# EAGLE board module (EAGLE 7.7.0)
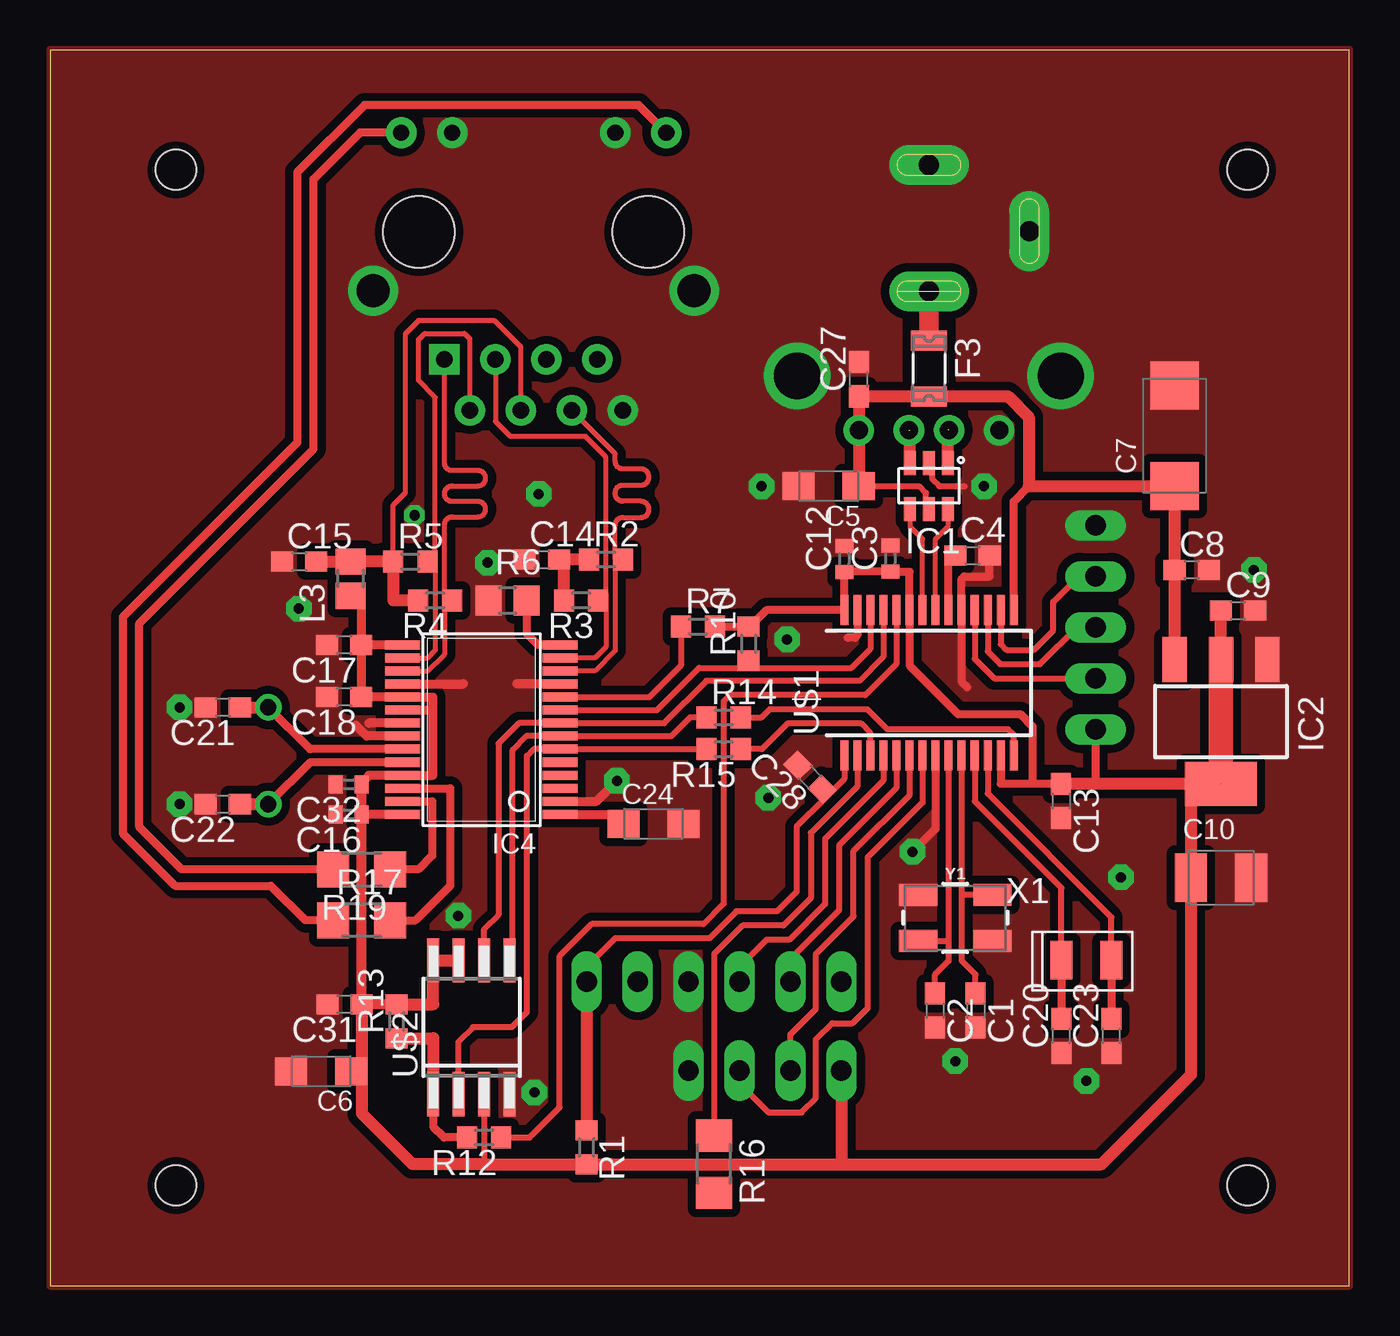
[diagram p0: board, top side]
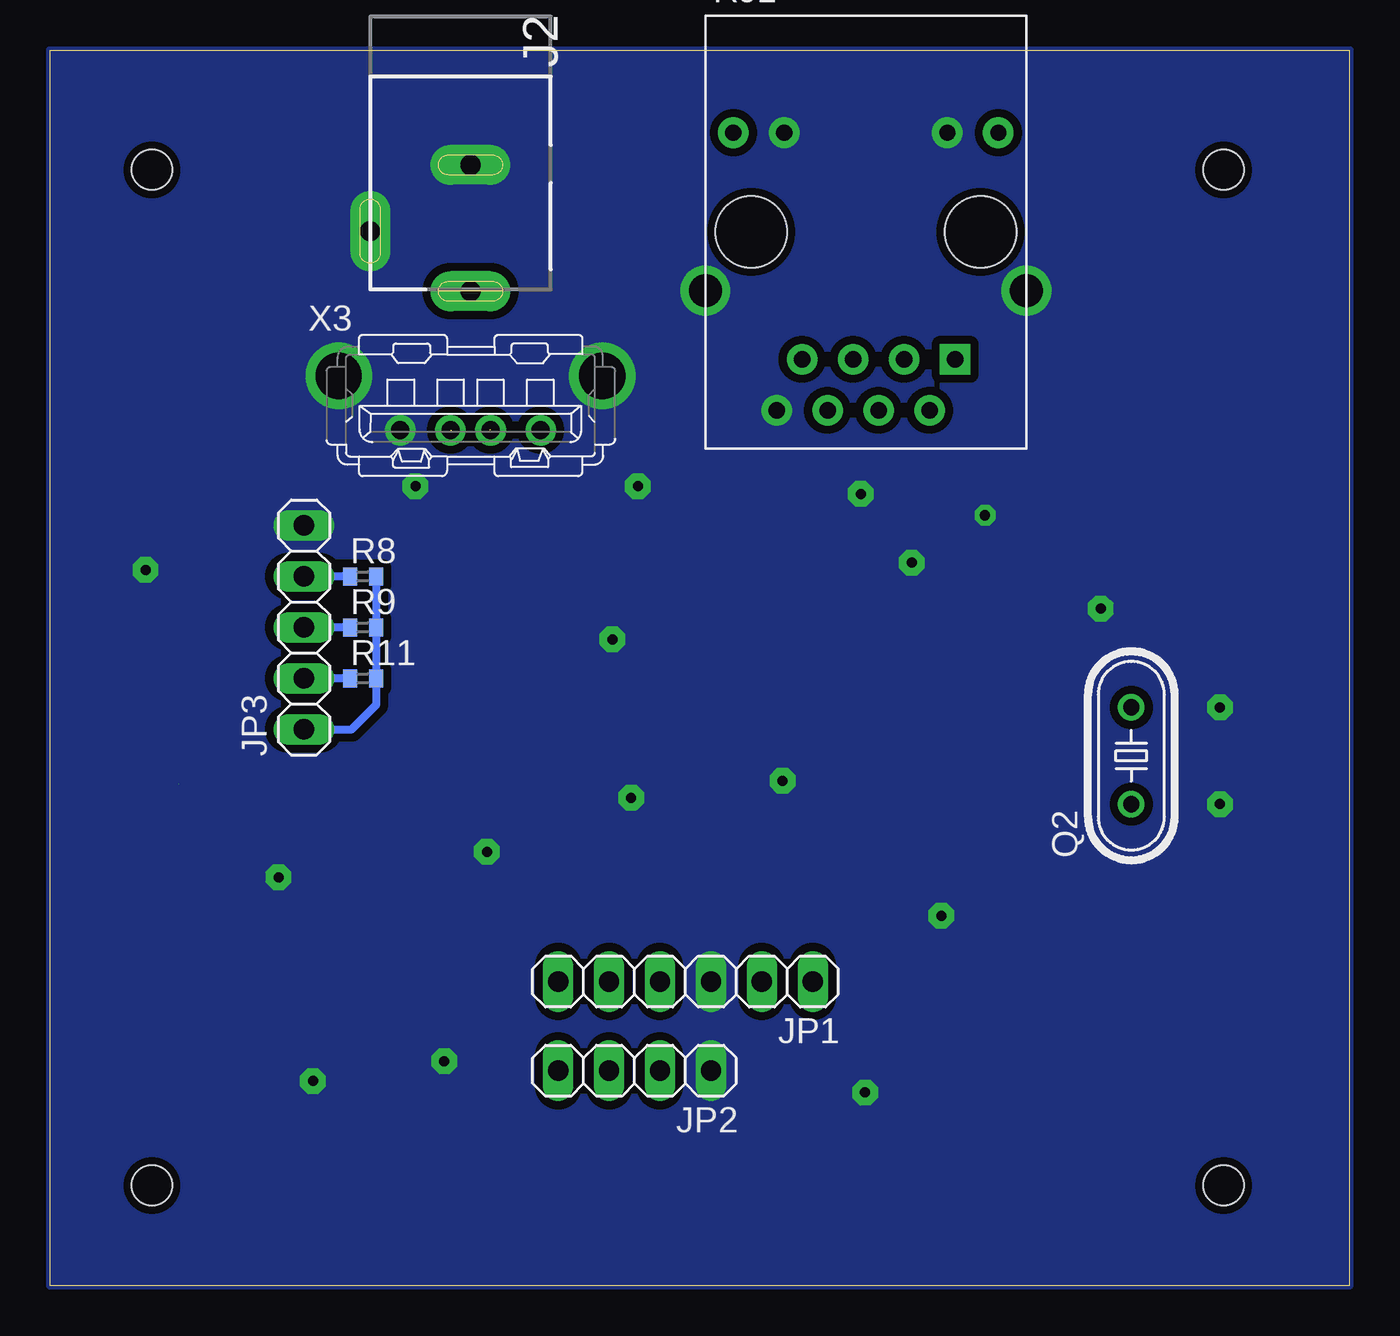
[diagram p1: board, bottom side, seen from below]

Size 64.77 x 61.59 mm. Coordinates in mm from the lower left corner, seen from the top.
Outline: 0,0 64.77,0 64.77,61.59 0,61.59 0,0
Copper layers (1*16): Top 0.035mm / dielectric 1.5mm / Bottom 0.035mm
Design rules "default *": minimum track width 10mil, minimum drill 24mil, track to track 8mil, track to pad 8mil, pad to pad 8mil, via to via 8mil, smd to smd 8mil, copper to edge 0mil, drill to drill 8mil, minimum pad ring 10mil, minimum via ring 8mil, stop-mask expansion 4mil, vias tented up to drill 0mil, thermal gap 10mil
Holes 2 mm at 6.27,55.63 6.27,5 59.7,5 59.7,55.63
tRestrict: area 16.6,23.3 to 18.4,32.2; area 24.5,23.3 to 26.3,32.2; area 39.4,32.9 to 48.2,34.4; area 39.4,25.7 to 48.2,27.2; area 43.5,40.6 to 44.1,41.6

## Footprints (pad centres in the part's own frame; a part is rotated, then mirrored left to right if it is on the bottom)
C0603 = smd 1.1 x 1: 1 -0.85,0; 2 0.85,0
C0402 = smd 0.7 x 0.9: 1 -0.65,0; 2 0.65,0
SMC_A = smd 1.6 x 1.4: + -1.5,0; - 1.5,0
SMC_C = smd 2.4 x 2.4: + -2.5,0; - 2.5,0
SMC_B = smd 1.6 x 2.4: + -1.5,0; - 1.5,0
1206L = smd 1 x 1.8: 1 -1.4,0; 2 1.4,0
SOT-23-6L = smd 0.6 x 1.2: 1 -0.95,-2.3; 2 0,-2.3; 3 0.95,-2.3; 4 0.95,0; 5 0,0; 6 -0.95,0
SOT223 = smd 1.219 x 2.235: 1 -2.311,-3.099; 2 0,-3.099; 3 2.311,-3.099 | smd 3.6 x 2.2: TAB 0,3.099
TSSOP28W = smd 0.45 x 1.75: P$1 0,-0.65; P$2 0.65,-0.65; P$3 1.3,-0.65; P$4 1.95,-0.65; P$5 2.6,-0.65; P$6 3.25,-0.65; P$7 3.9,-0.65; P$8 4.55,-0.65; P$9 5.2,-0.65; P$10 5.85,-0.65; P$11 6.5,-0.65; P$12 7.15,-0.65; P$13 7.8,-0.65; P$14 8.45,-0.65; P$15 8.45,7.2; P$16 7.8,7.2; P$17 7.15,7.2; P$18 6.5,7.2; P$19 5.85,7.2; P$20 5.2,7.2; P$21 4.55,7.2; P$22 3.9,7.2; P$23 3.25,7.2; P$24 2.6,7.2; P$25 1.95,7.2; P$26 1.3,7.2; P$27 0.65,7.2; P$28 0,7.2
POWER_JACK_SLOT = drill 1 pad 2 long: GND@1 2.58,7.5; GND@2 7.58,10.8; PWR 2.58,13.8
1X06 = drill 1.016 long: 1 -6.35,0; 2 -3.81,0; 3 -1.27,0; 4 1.27,0; 5 3.81,0; 6 6.35,0
1X04 = drill 1.016 long: 1 -3.81,0; 2 -1.27,0; 3 1.27,0; 4 3.81,0
1X05 = drill 1.016 long: 1 -5.08,0; 2 -2.54,0; 3 0,0; 4 2.54,0; 5 5.08,0
FB805 = smd 1.3 x 1.5: 1 -0.85,0; 2 0.85,0
HC49/S = drill 0.813: 1 -2.413,0; 2 2.413,0
R0603 = smd 1 x 1.1: 1 -0.85,0; 2 0.85,0
R0805 = smd 1.3 x 1.5: 1 -0.95,0; 2 0.95,0
R0402 = smd 0.7 x 0.9: 1 -0.65,0; 2 0.65,0
R1206 = smd 1.6 x 1.803: 1 -1.422,0; 2 1.422,0
HR911105A = drill 0.813 pad 1.524: G+ 4.953,-6.604; G- 4.953,-4.064; GND -8.89,4.445; NC -6.35,3.175; P4 -8.89,-0.635; P5 -6.35,0.635; RD+ -6.35,-1.905; RD- -8.89,1.905; TD- -8.89,-3.175; Y+ 4.953,6.604; Y- 4.953,4.064 | drill 1.651 pad 2.159: SHIELD0 -2.921,8.001; SHIELD1 -2.921,-8.001 | drill 0.813 pad 1.524 square: TD+ -6.35,-4.445 | hole 3.556: 0,-5.715; 0,5.715
SSOP28 = smd 0.4 x 1.5: 1 -4.225,-3.625; 2 -3.575,-3.625; 3 -2.925,-3.625; 4 -2.275,-3.625; 5 -1.625,-3.625; 6 -0.975,-3.625; 7 -0.325,-3.625; 8 0.325,-3.625; 9 0.975,-3.625; 10 1.625,-3.625; 11 2.275,-3.625; 12 2.925,-3.625; 13 3.575,-3.625; 14 4.225,-3.625; 15 4.225,3.625; 16 3.575,3.625; 17 2.925,3.625; 18 2.275,3.625; 19 1.625,3.625; 20 0.975,3.625; 21 0.325,3.625; 22 -0.325,3.625; 23 -0.975,3.625; 24 -1.625,3.625; 25 -2.275,3.625; 26 -2.925,3.625; 27 -3.575,3.625; 28 -4.225,3.625
SO-08M = smd 0.6 x 2.2: 1 -1.905,-3.33; 2 -0.635,-3.33; 3 0.635,-3.33; 4 1.905,-3.33; 5 1.905,3.33; 6 0.635,3.33; 7 -0.635,3.33; 8 -1.905,3.33
3.2X1.5-2-PAD = smd 1.1 x 1.9: 1 -1.25,0; 2 1.25,0
KUSBVX = drill 0.9 pad 1.524: 1 3.5,0; 2 1,0; 3 -1,0; 4 -3.5,0 | drill 2.3 pad 2.8: M1 -6.57,2.71; M2 6.57,2.71
CRYSTAL-SMD-5X3.2-4PAD = smd 1.9 x 1.1: 1 -1.85,-1.15; 2 1.85,-1.15; 3 1.85,1.15; 4 -1.85,1.15

## Placement (x,y rotation side)
C1  [C0603]  46.13,13.72 270 top
C2  [C0603]  44.11,13.72 270 top
C3  [C0402]  41.88,36.25 90 top
C4  [C0603]  45.99,36.4 0 top
C5  [SMC_A]  38.81,39.85 180 top
C6  [SMC_A]  13.51,10.69 180 top
C7  [SMC_C]  56.06,42.37 90 top
C8  [C0603]  56.91,35.69 0 top
C9  [C0603]  59.22,33.66 0 top
C10  [SMC_B]  58.37,20.34 0 top
C12  [C0402]  39.59,36.23 90 top
C13  [C0603]  50.39,24.17 270 top
C14  [C0603]  24.51,36.2 0 top
C15  [C0603]  12.42,36.09 0 top
C16  [C0402]  14.88,23.5 180 top
C17  [C0603]  14.66,31.95 180 top
C18  [C0603]  14.65,29.35 180 top
C20  [C0603]  50.41,12.45 90 top
C21  [C0603]  8.61,28.83 180 top
C22  [C0603]  8.61,24 180 top
C23  [C0603]  52.91,12.45 90 top
C24  [SMC_A]  30.08,23.02 0 top
C27  [C0603]  40.31,45.19 90 top
C28  [C0603]  37.88,25.35 135 top
C31  100nF  [C0603]  14.68,14.03 180 top
C32  [C0402]  14.88,24.99 180 top
F3  1206L012  [1206L]  43.81,45.72 270 top
IC1  IC_USBLC6-2  [SOT-23-6L]  43.81,38.71 180 top
IC2  LM1117IMPX-3.3  [SOT223]  58.37,28.12 180 top
IC4  ENC28J60  [TSSOP28W]  24.77,23.5 90 top
J2  POWER_JACKSLT  [POWER_JACK_SLOT]  41.24,63.37 180 bottom
JP1  [1X06]  33.1,15.16 180 bottom
JP2  [1X04]  35.64,10.72 180 bottom
JP3  [1X05]  52.12,32.82 90 bottom
L3  [FB805]  14.98,35.24 90 top
Q2  [HC49/S]  10.87,26.42 90 bottom
R1  [R0603]  26.75,6.9 270 top
R2  [R0603]  27.71,36.2 0 top
R3  [R0603]  26.47,34.16 180 top
R4  [R0603]  19.19,34.16 180 top
R5  [R0603]  17.96,36.09 0 top
R6  [R0805]  22.81,34.16 0 top
R7  [R0603]  32.3,32.85 0 top
R8  [R0402]  49.17,35.36 0 bottom
R9  [R0402]  49.17,32.82 0 bottom
R10  [R0603]  34.82,32 90 top
R11  [R0402]  49.17,30.28 0 bottom
R12  0R  [R0603]  21.64,7.39 180 top
R13  10k?  [R0603]  17.27,13.18 90 top
R14  [R0603]  33.58,28.33 0 top
R15  [R0603]  33.58,26.75 180 top
R16  [R1206]  33.1,6.06 270 top
R17  [R1206]  15.53,18.21 0 top
R19  [R1206]  15.53,20.75 180 top
RJ1  HR911105A  [HR911105A]  24.1,52.53 90 bottom
U$1  PIC32MX250F128B2  [SSOP28]  43.81,30.05 0 top
U$2  SST25VF016BSO8M  [SO-08M]  21.01,12.88 0 top
X1  CRYSTALS-NOGND-CFPX-217  [3.2X1.5-2-PAD]  51.66,16.23 0 top
X3  KUSBVX  [KUSBVX]  43.81,42.65 0 bottom
Y1  CRYSTAL-GROUNDEDSMD-5X3.2  [CRYSTAL-SMD-5X3.2-4PAD]  45.12,18.34 0 top

## Library data of the parts
C1-C10 C12-C18 C20-C24 C27 C28 C31 C32 R1-R17 R19 = rcl
F3 = polyfuse-smd_10; MF: Littelfuse; MPN: 1206L012; OC_FARNELL: 1596988; OC_NEWARK: 05M2298
IC1 L3 = dp_devices
IC2 = lm1117
IC4 = microchip
J2 = SparkFun-Connectors; PROD_ID: PRT-00119
JP1-JP3 = pinhead
Q2 = crystal; OC_FARNELL: 1667008; OC_NEWARK: unknown
RJ1 = hanrun
U$1 = microchip-pic32mx
U$2 = mw
X1 = IQD-Frequency-Products
X3 = con-kycon
Y1 = SparkFun-Clocks

## Nets
_3V: C3.1 C6.+ C9.1 C10.+ C12.1 C13.1 C16.1 C17.1 C18.1 C31.1 C32.1 IC2.2 IC2.TAB IC4.P$15 IC4.P$19 IC4.P$20 IC4.P$25 IC4.P$28 JP2.4 JP3.1 L3.1 R1.2 R7.2 R8.2 R9.2 R10.2 R11.2 R13.2 U$1.13 U$1.23 U$1.28 U$2.3 U$2.7 U$2.8
CE: R12.1 U$1.24
CE1: R12.2 R13.1 U$2.1
D_N: IC1.4 U$1.22
D_P: IC1.6 U$1.21
ENC_CS: IC4.P$9 R10.1 U$1.26
ENC_RST: IC4.P$10 R7.1
GND: C1.2 C2.2 C3.2 C4.2 C5.- C6.- C7.- C8.2 C9.2 C10.- C12.2 C13.2 C14.1 C15.1 C16.2 C17.2 C18.2 C20.1 C21.2 C22.2 C23.1 C24.- C27.2 C28.2 C31.2 C32.2 IC1.2 IC2.1 IC4.P$2 IC4.P$11 IC4.P$18 IC4.P$21 IC4.P$22 J2.GND@1 J2.GND@2 JP1.3 JP2.1 JP3.5 R6.1 RJ1.G- RJ1.GND RJ1.SHIELD0 RJ1.SHIELD1 RJ1.Y- U$1.8 U$1.19 U$1.27 U$2.4 X3.4 X3.M1 X3.M2 Y1.2 Y1.4
IO_INT: JP3.4 R8.1 U$1.16
LEDA: IC4.P$27 R19.1
LEDB: IC4.P$26 R17.2
MCLR: C28.1 JP1.1 R1.1 U$1.1
MISO: IC4.P$6 R15.2 U$2.2
MOSI: IC4.P$7 R14.1 U$2.5
N$2: C14.2 R2.1 R3.2
N$6: C15.2 L3.2 R4.2 R5.1 RJ1.P4
N$7: C4.1 U$1.20
N$9: IC1.1 X3.3
N$10: IC1.3 X3.2
N$12: IC4.P$14 R6.2
N$13: R14.2 U$1.14
N$14: F3.1 J2.PWR
N$15: R15.1 U$1.3
N$16: R16.1 U$1.2
N$17: C1.1 U$1.10 Y1.3
N$18: C2.1 U$1.9 Y1.1
N$22: C21.1 IC4.P$23 Q2.2
N$23: C22.1 IC4.P$24 Q2.1
N$29: C24.+ IC4.P$1
N$30: R17.1 RJ1.Y+
N$31: R19.2 RJ1.G+
PGEC: JP1.5 U$1.5
PGED: JP1.4 U$1.4
RXD: JP2.3 U$1.6
SCK: IC4.P$8 U$1.25 U$2.6
SCL: JP3.3 R9.1 U$1.17
SDA: JP3.2 R11.1 U$1.18
SOSCI: C20.2 U$1.11 X1.1
SOSCO: C23.2 U$1.12 X1.2
TPIN_N: IC4.P$12 R2.2 RJ1.RD-
TPIN_P: IC4.P$13 R3.1 RJ1.RD+
TPOUT_N: IC4.P$16 R5.2 RJ1.TD-
TPOUT_P: IC4.P$17 R4.1 RJ1.TD+
TXD: JP2.2 U$1.7
VBUS: C5.+ C7.+ C8.1 C27.1 F3.2 IC1.5 IC2.3 U$1.15 X3.1

## Tracks (layer width: path | path; a pad name or v marks a point on that pad's centre or on a via)
_3V  (1 unrouted)
  Top 0.305: U$2.3 21.64,6.06 | R1.2 27.95,6.05 27.94,6.06 | C10.+ 56.87,20.32
  Top 0.406: U$1.13 47.39,25.02 48.97,25.02 | 48.97,25.02 48.97,27.89 48.36,28.5 45.26,28.5 42.84,30.92 U$1.23 42.84,35.6 C3.1 39.6,35.6 C12.1 U$1.28 | 39.59,33.23 U$1.28 | U$1.28 35.7,33.67 34.89,32.85 R10.2 R7.2 | 48.97,25.02 C13.1 | JP3.1 52.12,25.02 | C6.+ 15.43,10.69 15.53,10.79
  Top 0.457: IC4.P$20 19.07,28.7 | 19.07,28.7 19.07,25.45 IC4.P$25 15.89,25.45 15.53,25.09 C32.1 | IC4.P$28 C16.1 | 19.07,28.7 19.07,29.34 IC4.P$19 C18.1 C17.1 | L3.1 15.45,33.92 15.5,33.92 C17.1 | IC4.P$15 C17.1
  Top 0.508: C32.1 C16.1 C31.1 R13.2
  Top 0.61: R13.2 19.1,14.03 U$2.8 U$2.7 | C31.1 15.53,10.79 15.53,8.6 18.07,6.06 21.64,6.06 27.94,6.06 39.45,6.06 | JP2.4 39.45,6.06 | 39.45,6.06 52.41,6.06 56.87,10.52 56.87,20.32 56.87,25.02 | IC2.2 C9.1 | 56.87,25.02 IC2.TAB | 56.87,25.02 52.12,25.02 C13.1
  Top 1.219: IC2.TAB IC2.2
  Bottom 0.406: R8.2 R9.2 R11.2 48.52,28.95 49.73,27.74 JP3.1
CE
  Top 0.305: U$1.24 42.19,30.99 40.64,29.44 33.88,29.44 33.58,29.13 33.58,19.05 32.56,18.03 27,18.03 25.4,16.43 25.4,8.89 23.9,7.39 R12.1
CE1
  Top 0.406: R12.2 19.63,7.39 19.1,7.92 U$2.1
  Top 0.61: R13.1 19.1,12.33 U$2.1
D_N
  Top 0.254: U$1.22 43.49,37.23 42.87,37.86 IC1.4
D_P
  Top 0.254: U$1.21 44.14,37.23 44.77,37.86 IC1.6
ENC_CS
  Top 0.305: U$1.26 40.89,31.75 39.95,30.8 34.92,30.8 | 34.92,30.8 32.35,30.8 30.24,28.7 IC4.P$9 | R10.1 34.82,30.91 34.92,30.8
ENC_RST
  Top 0.305: IC4.P$10 29.88,29.34 31.45,30.91 R7.1 31.45,32.82
GND  (via drill 0.5 pad 1.02, 0.5 pad 1.27)
  Top 0.305: 45.59,39.85 44.32,39.85 43.96,40.21 43.96,40.86 IC1.2
  Top 0.406: U$1.27 40.24,32.42 40.13,32.31 39.75,32.31 | U$1.8 44.14,22.78 v42.99,21.63 | C4.2 46.84,35.36 45.57,35.36 45.44,35.23 U$1.19 45.44,30.12 45.72,29.84
  Top 0.457: IC4.P$11 23.27,30 | IC4.P$18 20.6,30 | IC4.P$21 15.9,28.05 | IC4.P$22 15.79,27.39 15.24,27.94 | IC4.P$2 27.23,24.14 v28.26,25.17
  other vias: 18.16,38.4 6.45,28.83 6.45,24 12.4,33.76 21.82,36.04 24.36,39.47 46.56,39.85 24.14,9.63 36.74,32.22 35.8,24.32 20.35,18.44 45.12,11.19 51.66,10.2 53.39,20.36 35.47,39.85 60.01,35.69
  pour Top (isolate 0.406, rank 2, no thermals): 0,61.59 0,0 64.77,0 64.77,61.59
  pour Bottom (isolate 0.406, no thermals): 0,61.59 0,0 64.77,0 64.77,61.59
IO_INT
  Top 0.305: U$1.16 47.39,31.98 47.68,31.7 49.05,31.7 50.01,32.66 50.01,34.09 51.28,35.36 JP3.4
  Bottom 0.406: R8.1 JP3.4
LEDA
  Top 0.406: IC4.P$27 19.05,24.14 19.05,21.44 18.36,20.75 R19.1
LEDB
  Top 0.406: IC4.P$26 19.94,24.8 19.94,19.94 18.21,18.21 R17.2
MCLR
  Top 0.305: JP1.1 26.75,15.9 28.17,17.32 32.87,17.32 34.21,18.67 36.25,18.67 37.21,19.63 37.21,22.89 38.59,24.27 | U$1.1 39.59,25.26 38.59,24.27 | C28.1 38.48,24.38 38.59,24.27
  Top 0.61: JP1.1 R1.1
MISO
  Top 0.305: U$2.2 20.37,12.17 21.08,12.88 23.01,12.88 23.77,13.64 23.77,26.42 24.11,26.75 IC4.P$6 R15.2
MOSI
  Top 0.305: U$2.5 23.06,15.63 23.06,26.72 23.74,27.39 IC4.P$7 30.97,27.39 31.91,28.33 R14.1
N$1
  cutout Top: 42.51,48.26 42.51,44.45 45.12,44.45 45.12,48.26
N$2
  Top 0.61: R3.2 25.62,36.02 25.54,36.02 C14.2 R2.1
N$3
  cutout Top: 56.52,34.56 57.78,34.56 57.78,33.66 56.52,33.66
N$6
  Top 0.254: RJ1.P4 23.47,46.79 22.12,48.13 18.39,48.13 17.7,47.45 17.7,39.52 17.11,38.93 R5.1
  Top 0.61: R4.2 17.11,34.16 R5.1 L3.2 C15.2
N$7
  Top 0.406: U$1.20 44.79,36.05 C4.1
N$9  (1 unrouted)
  Top 0.602: IC1.1 44.77,42.64
N$10  (1 unrouted)
  Top 0.602: IC1.3 42.87,42.64
N$12
  Top 0.406: IC4.P$14 24.32,31.95 23.76,32.5 R6.2
N$13
  Top 0.305: U$1.14 48.04,27.45 47.75,27.74 41.73,27.74 40.74,28.73 35.87,28.73 35.47,28.33 R14.2
N$14
  Top 0.813: F3.1
  Top 0.965: J2.PWR F3.1
N$15
  Top 0.305: U$1.3 40.89,27.56 40.44,28.02 36.75,28.02 35.48,26.75 R15.1
N$16
  Top 0.305: U$1.2 40.24,24.9 37.92,22.58 37.92,19.33 36.55,17.96 34.52,17.96 33.1,16.54 R16.1
N$17
  Top 0.305: U$1.10 45.44,19.49 | 45.44,19.49 45.44,16.21 46.13,15.51 C1.1 | Y1.3 45.44,19.49
N$18
  Top 0.305: U$1.9 44.79,17.19 | 44.79,17.19 44.79,16.19 44.11,15.51 C2.1 | Y1.1 44.79,17.19
N$22
  Top 0.406: IC4.P$23 12.96,26.75 Q2.2
  Top 0.61: C21.1 Q2.2
N$23
  Top 0.406: IC4.P$24 12.96,26.09 Q2.1
  Top 0.61: C22.1 Q2.1
N$29
  Top 0.457: IC4.P$1 28.11,23.5 C24.+
N$30
  Top 0.406: RJ1.Y+ 29.34,58.85 15.67,58.85 12.32,55.5 12.32,42.04 3.63,33.35 3.63,22.53 6.22,19.94 11,19.94 12.72,18.21 R17.1
N$31
  Top 0.406: R19.2 6.55,20.75 4.45,22.86 4.45,33.02 13.13,41.71 13.13,55.17 15.44,57.48 RJ1.G+
PGEC
  Top 0.305: U$1.5 42.19,24.82 39.34,21.97 39.34,18.72 36.91,16.28 JP1.5
PGED
  Top 0.305: U$1.4 41.54,25.18 38.63,22.28 38.63,19.02 36.85,17.25 35.71,17.25 34.37,15.9 JP1.4
RXD
  Top 0.305: U$1.6 42.84,24.45 40.06,21.67 40.06,18.41 38.18,16.54 38.18,13.79 36.91,12.52 JP2.3
SCK
  Top 0.305: U$1.25 41.54,31.36 40.34,30.15 32.72,30.15 30.61,28.05 IC4.P$8 23.37,28.05 22.35,27.03 22.35,18.49 21.64,17.78 U$2.6
SCL
  Top 0.305: U$1.17 46.74,31.62 47.37,30.99 49.35,30.99 51.18,32.82 JP3.3
  Bottom 0.406: R9.1 JP3.3
SDA
  Top 0.305: U$1.18 46.09,31.25 47.07,30.28 JP3.2
  Bottom 0.406: R11.1 JP3.2
SOSCI
  Top 0.305: U$1.11 46.09,24.14 50.41,19.82 X1.1
  Top 0.406: X1.1 C20.2
SOSCO
  Top 0.305: U$1.12 46.74,24.53 52.91,18.36 X1.2
  Top 0.406: X1.2 C23.2
TPIN_N
  Top 0.254: IC4.P$12 27.16,30.64 28.17,31.66 28.17,36.22 | RJ1.RD- 28.17,41.48 28.17,41.1 arc90 28.55,40.72 29.46,40.72 arc-90 29.84,40.34 29.84,40.29 arc-90 29.46,39.91 28.55,39.91 arc90 28.17,39.53 28.17,39.48 arc90 28.55,39.1 29.46,39.1 arc-90 29.84,38.72 29.84,38.68 arc-90 29.46,38.3 28.55,38.3 arc90 28.17,37.91 28.17,36.22 | R2.2 28.19,36.2 28.17,36.22
TPIN_P
  Top 0.254: IC4.P$13 27.16,31.3 27.71,31.84 27.71,34.47 | 27.71,34.47 27.71,41.3 26.67,42.34 22.94,42.34 22.2,43.08 RJ1.RD+ | R3.1 27.41,34.16 27.71,34.47
TPOUT_N
  Top 0.254: R5.2 19.2,36.09 | 19.2,36.09 19.2,44.3 18.36,45.14 18.36,47.17 18.67,47.47 20.65,47.47 20.93,47.19 RJ1.TD- | 19.2,36.09 19.2,31.67 18.83,31.3 IC4.P$16
TPOUT_P
  Top 0.254: 19.66,34.06 19.66,31.48 18.83,30.64 IC4.P$17 | R4.1 19.66,34.06 | 19.66,34.06 19.66,37.95 arc-90 20.04,38.33 21.32,38.33 arc90 21.71,38.71 21.71,38.72 arc90 21.32,39.1 20.04,39.1 arc-90 19.66,39.48 19.66,39.49 arc-90 20.04,39.87 21.32,39.87 arc90 21.71,40.25 21.71,40.26 arc90 21.32,40.64 20.04,40.64 arc-90 19.66,41.02 RJ1.TD+
TXD
  Top 0.305: U$1.7 43.49,24.08 40.77,21.36 40.77,13.84 40.01,13.08 38.99,13.08 38.18,12.27 38.18,9.35 37.47,8.64 35.81,8.64 34.37,10.08 JP2.2
VBUS
  Top 0.305: IC1.5 43.67,38.86 43.67,39.52 43.33,39.85 C5.+ | C8.1 56.06,35.56
  Top 0.406: F3.2 43.81,44.34 | U$1.15 48.04,39.1 48.79,39.85
  Top 0.61: IC2.3 56.06,35.56 C7.+ 56.04,39.85 48.79,39.85 48.79,43.28 47.74,44.34 43.81,44.34 C27.1 X3.1 C5.+